# Altium PCB Relays.PcbDoc
Units mm, origin at the board's own origin, x right, y up, seen from the top; angles counter-clockwise.
Board outline 99 x 99 mm, 2 copper layers (Top Layer, Bottom Layer); 50 components, 27 nets, 119 pads, 2 vias.
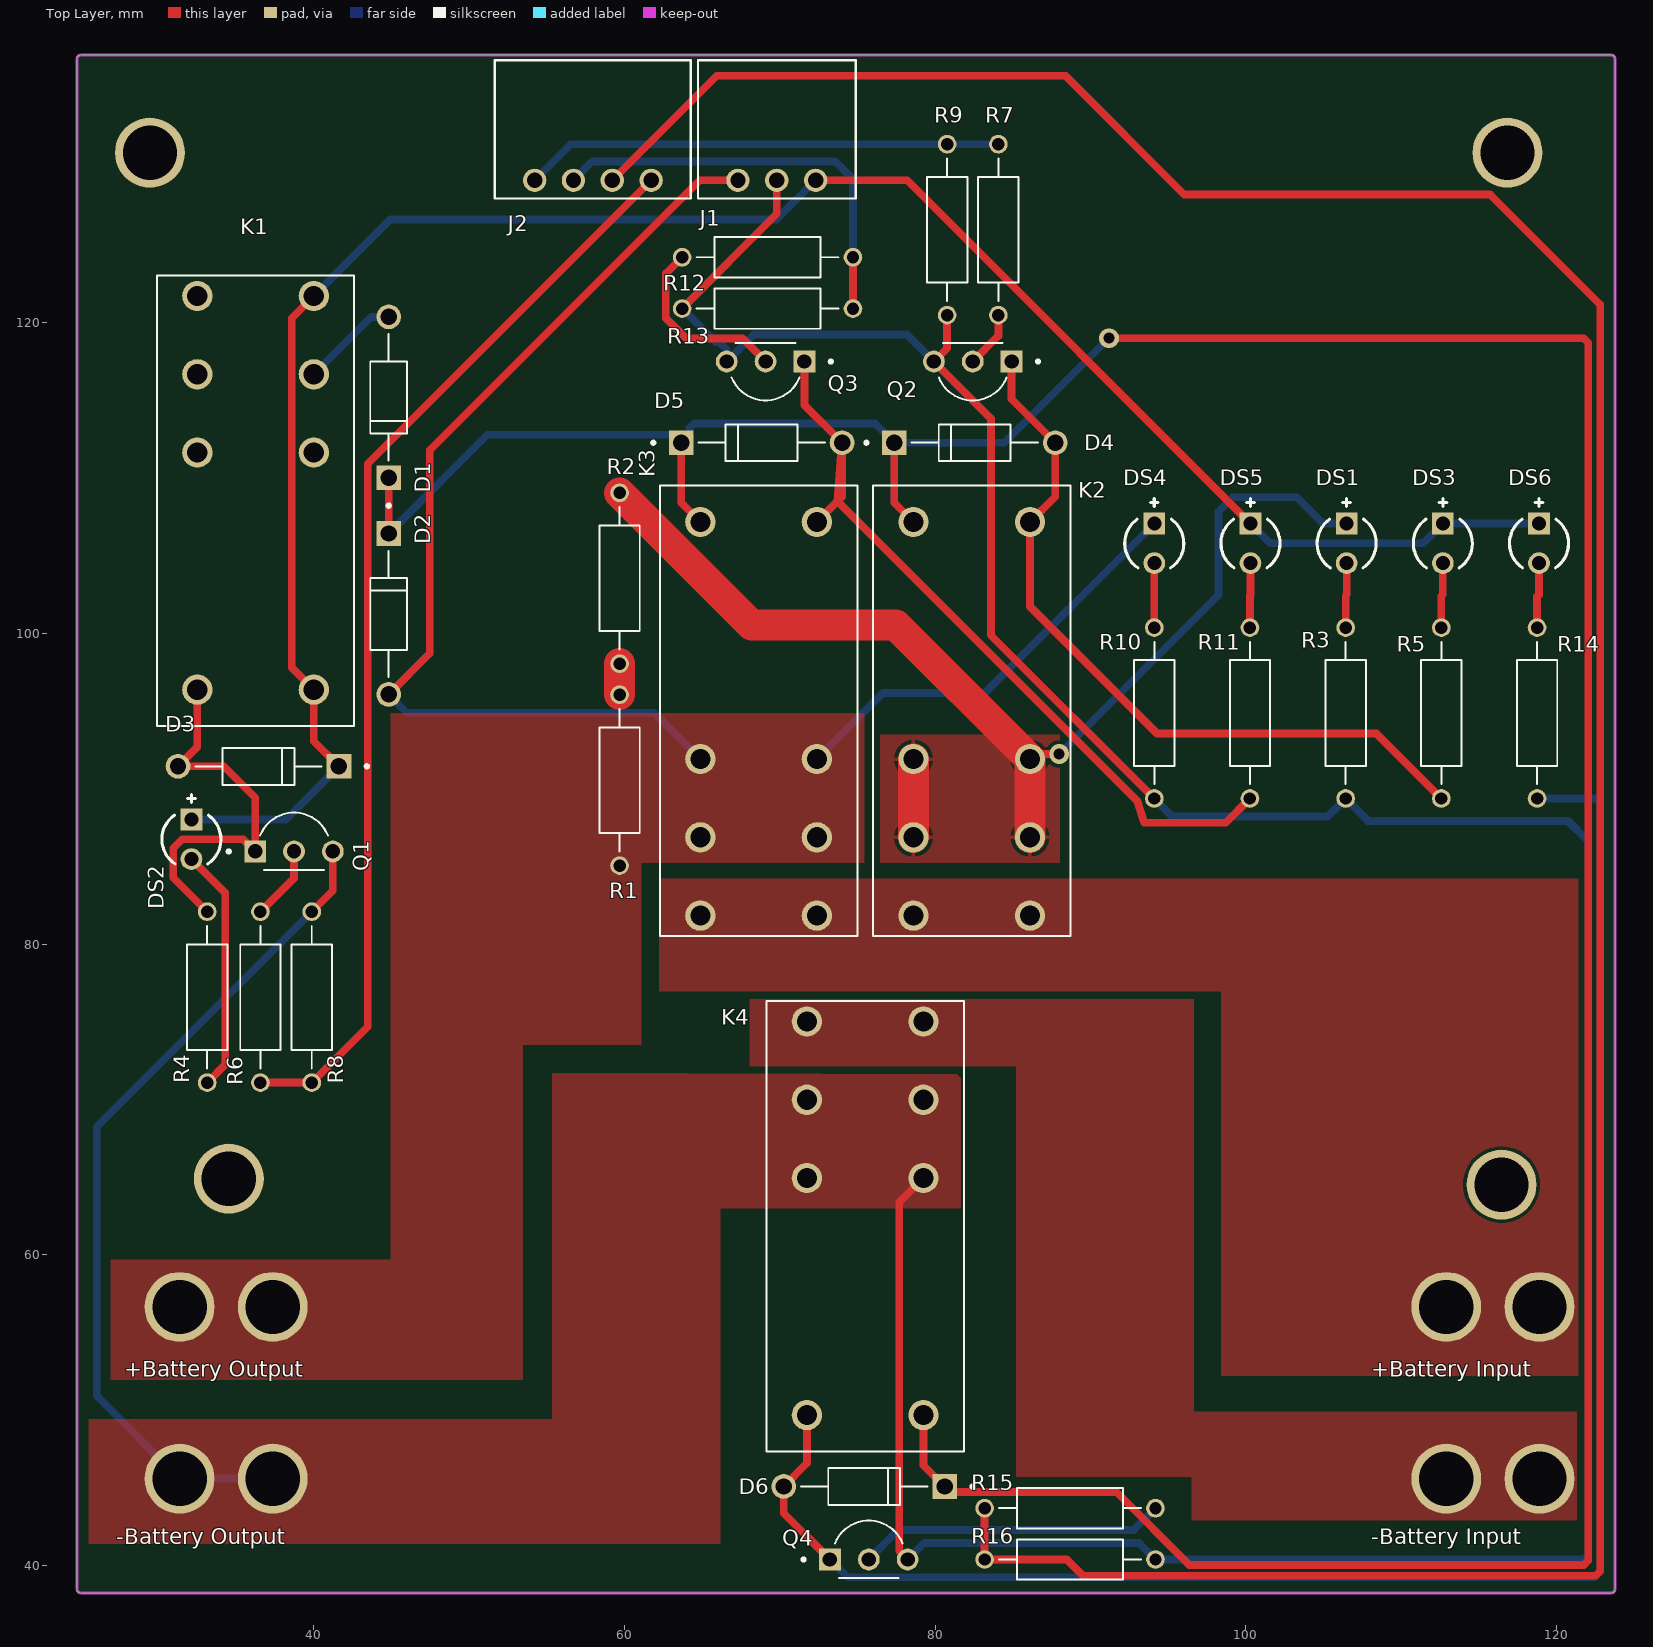
[diagram p0: Top Layer view]
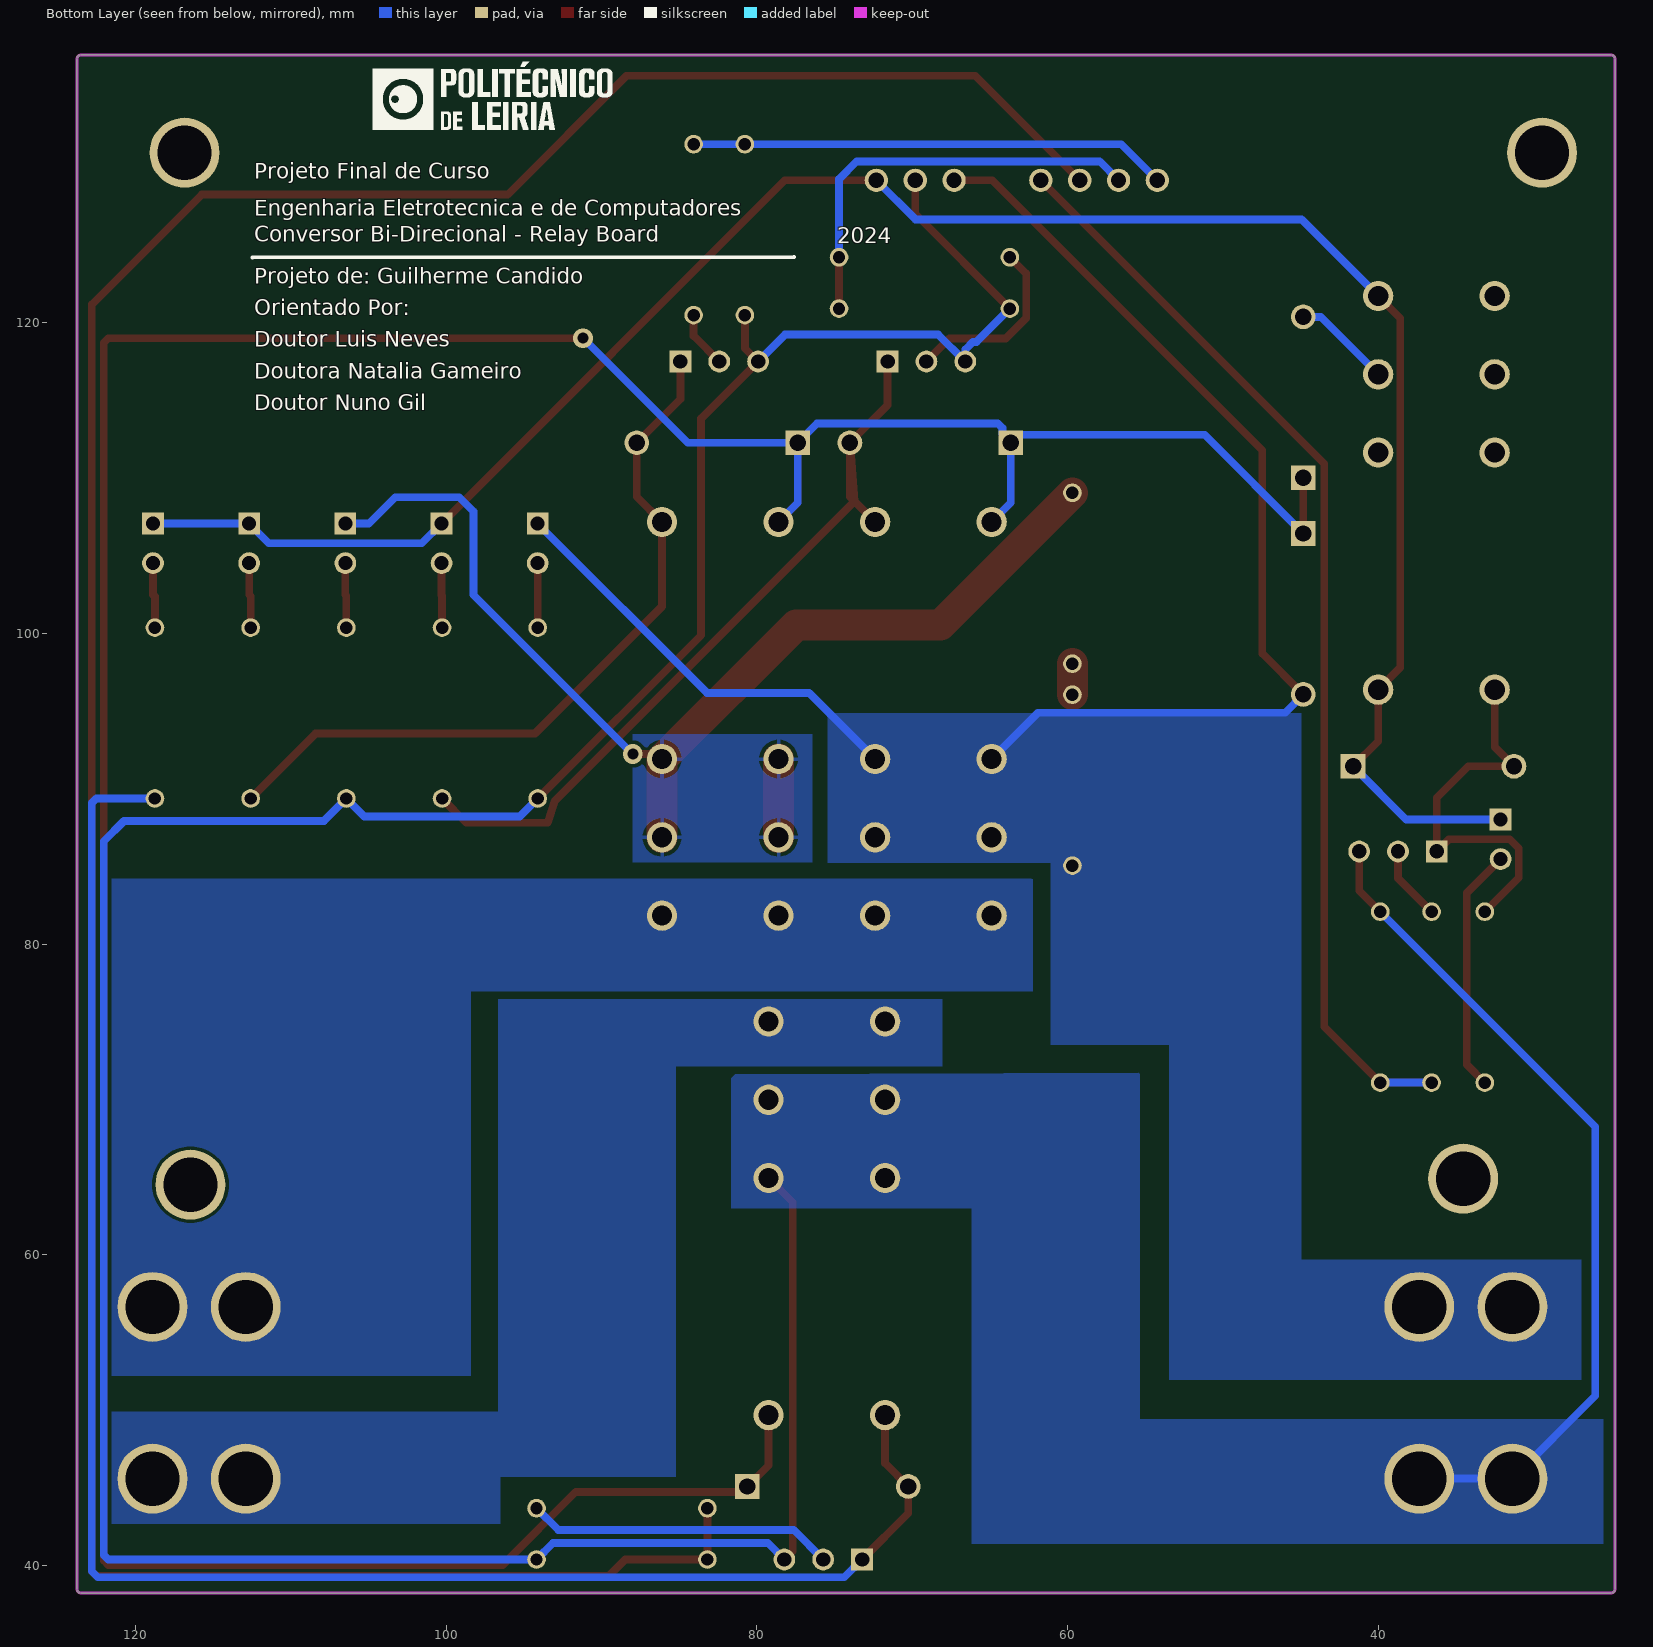
[diagram p1: Bottom Layer view, seen from below]

## Layer stack, top to bottom
Top Solder: solder mask 0.0102, Solder Resist, Dk 3.5
Top Layer: signal copper 0.0356
Dielectric 1: dielectric 0.32, FR-4, Dk 4.8
Bottom Layer: signal copper 0.0356
Bottom Solder: solder mask 0.0102, Solder Resist, Dk 3.5

## Board outline
24.765,38.481 24.765,136.973 cw(c25.019,136.973) 25.019,137.227 123.511,137.227 cw(c123.511,136.973) 123.765,136.973 123.765,38.481 cw(c123.511,38.481) 123.511,38.227 25.019,38.227 cw(c25.019,38.481)

## Design rules (kind name [scope] priority, off if disabled: settings)
Clearance [All] p1: gap=0.2 ignorepadtopadclearanceinfootprint=TRUE
HoleSize [All] p1: absolutevalues=TRUE maxlimit=6.3 minlimit=0.3 maxpercent=80.000 minpercent=20.000
HoleToHoleClearance [All] p1: gap=0.5 allowstackedmicrovias=TRUE
PolygonConnect DirectPour [InNetClass('DirectPour')] p1: connectstyle=Direct reliefconductorwidth=0.254 reliefentries=4 polygonreliefangle="90 Angle" airgapwidth=0.254
PolygonConnect [All] p2: connectstyle=Relief reliefconductorwidth=0.254 reliefentries=4 polygonreliefangle="90 Angle" airgapwidth=0.254
RoutingVias [All] p1: holewidth=0.711 width=1.27 viastyle="Through Hole" minholewidth=0.3 minwidth=0.5 maxholewidth=6.3 maxwidth=10
SilkToSilkClearance [All] p1: silktosilkclearance=0
SolderMaskExpansion [All] p1: expansion=0.102 istentingtop=FALSE
UnRoutedNet [All] p1: checkbadconnections=TRUE
Width [All] p1: maxlimit=5 minlimit=0.127 preferedwidth=0.5 minimp=50.000000 maximp=50.000000 favimp=50.000000
26 further rules are at their usual default settings.

## Classes and differential pairs
net class DirectPour: +12 +24 GND Net*4_1 Net*6_1
component class Relays: D1 D2 D3 D4 D5 D6 DS1 DS2 DS3 DS4 DS5 DS6 J1 J2 K1 K2 K3 K4 Q1 Q2 Q3 Q4 R1 R2 R3 R4 R5 R6 R7 R8 R9 R10 R11 R12 R13 R14 R15 R16

## Components (designator, comment, footprint, x,y, rotation, side; value= is the part's Value field where it differs from the comment)
* "M3 Mounting Hole" "M3 - Mounting Hole"#1 75.438,55.118 r0 top
*1 "M3 Mounting Hole" "M3 - Mounting Hole"#2 81.407,54.61 r0 top
*2 "M3 Mounting Hole" "M3 - Mounting Hole"#3 74.549,65.532 r0 top
*3 "M3 Mounting Hole" "M3 - Mounting Hole"#4 80.518,65.532 r0 top
*4 "M3 Mounting Hole" "M3 - Mounting Hole"#5 149.86,64.262 r0 top
*5 "M3 Mounting Hole" "M3 - Mounting Hole"#6 155.829,64.262 r0 top
*6 "M3 Mounting Hole" "M3 - Mounting Hole"#7 149.606,53.848 r0 top
*7 "M3 Mounting Hole" "M3 - Mounting Hole"#8 155.575,53.848 r0 top
*8 "M3 Mounting Hole" "M3 - Mounting Hole"#9 29.464,130.937 r0 top
*9 "M3 Mounting Hole" "M3 - Mounting Hole"#9 116.84,130.937 r0 top
*10 "M3 Mounting Hole" "M3 - Mounting Hole"#9 34.544,64.897 r0 top
*11 "M3 Mounting Hole" "M3 - Mounting Hole"#9 116.459,64.516 r0 top
D1 "1N4007" "Common Trhough Hole" 44.831,115.189 r90 top
D2 "1N4007" "Common Trhough Hole" 44.831,101.246 r270 top
D3 "Normal Diode" "Common Trhough Hole" 36.449,91.44 r180 top
D4 "Normal Diode" "Common Trhough Hole" 82.55,112.268 r0 top
D5 "Normal Diode" "Common Trhough Hole" 68.834,112.268 r0 top
D6 "Normal Diode" "Common Trhough Hole" 75.438,45.085 r180 top
DS1 "LTL-1CHE" LED_3mm 106.489,105.791 r270 top
DS2 "LTL-1CHE" LED_3mm 32.131,86.741 r270 top
DS3 "LTL-1CHE" LED_3mm 112.681,105.791 r270 top
DS4 "LTL-1CHE" LED_3mm 94.107,105.791 r270 top
DS5 "LTL-1CHE" LED_3mm 100.298,105.791 r270 top
DS6 "LTL-1CHE" LED_3mm 118.872,105.791 r270 top
J1 "S3B-XH-A(LF)(SN)" "3P JST XH2.54mm 90º" 67.31,129.159 r0 top
J2 "S4B-XH-A(LF)(SN)" "4P JST XH2.54mm 90º" 54.222,129.159 r0 top
K1 "relay 8pin" "Relay socket 8pin" 36.262,109.043 r90 top
K2 "relay 8pin" "Relay socket 8pin" 82.356,94.498 r270 top
K3 "relay 8pin" "Relay socket 8pin" 68.64,94.498 r270 top
K4 "relay 8pin" "Relay socket 8pin" 75.498,62.347 r90 top
Q1 "BC548" bc548 38.735,86.614 r0 top
Q2 "BC548" bc548 82.423,116.84 r180 top
Q3 "BC548" bc548 69.088,116.84 r180 top
Q4 "BC548" bc548 75.732,41.041 r0 top
R1 "Resistor" "Resistor_Through Hole" 59.69,90.551 r90 top
R2 "Resistor" "Resistor_Through Hole" 59.69,103.544 r90 top
R3 "Resistor_Through Hole" "Resistor_Through Hole" 106.426,94.869 r270 top
R4 "Resistor_Through Hole" "Resistor_Through Hole" 33.147,76.581 r90 top
R5 "Resistor_Through Hole" "Resistor_Through Hole" 112.585,94.869 r270 top
R6 "Resistor_Through Hole" "Resistor_Through Hole" 36.576,76.581 r270 top
R7 "Resistor_Through Hole" "Resistor_Through Hole" 84.074,125.984 r90 top
R8 "Resistor_Through Hole" "Resistor_Through Hole" 39.878,76.581 r270 top
R9 "Resistor_Through Hole" "Resistor_Through Hole" 80.772,125.984 r90 top
R10 "Resistor_Through Hole" "Resistor_Through Hole" 94.107,94.869 r270 top
R11 "Resistor_Through Hole" "Resistor_Through Hole" 100.266,94.869 r270 top
R12 "Resistor_Through Hole" "Resistor_Through Hole" 69.215,124.206 r0 top
R13 "Resistor_Through Hole" "Resistor_Through Hole" 69.215,120.904 r0 top
R14 "Resistor_Through Hole" "Resistor_Through Hole" 118.745,94.869 r270 top
R15 "Resistor_Through Hole" "Resistor_Through Hole" 88.685,43.688 r180 top
R16 "Resistor_Through Hole" "Resistor_Through Hole" 88.685,40.386 r180 top

## Footprints (in the part's own frame and the unit in brackets; to place one, negate y for a bottom-side part, rotate by r counter-clockwise, add the part's x,y. Pads: shape width x height; smd on the part's side, far side on the other; paste and mask are expansions set on the pad)
"3P JST XH2.54mm 90º" [mil]
  round 59 / inner round 60 / far side round 59 hole 39 paste-99999 mask+0: 1(0,0) 2(98.43,0) 3(196.86,0)
  silkscreen extent -101,-46 298,304, body extent -98,-10 295,285, height 236
"4P JST XH2.54mm 90º" [mil]
  round 59 / inner round 60 / far side round 59 hole 39 paste-99999 mask+0: 1(0,0) 2(98.43,0) 3(196.85,0) 4(295.28,0)
  silkscreen extent -101,-46 396,304, body extent -98,-10 394,285, height 236
bc548 [mm]
  rect 1.4x1.4 hole 0.93: 1(-2.5,-0.655)
  round 1.4 hole 0.93: 2(0,-0.655) 3(2.5,-0.655)
  silkscreen extent -4.3,-1.85 2.18,1.85, body extent -2.4,-1.53 2.4,2.4, height 7.74
"Common Trhough Hole" [mm]
  rect 1.59x1.59 / inner round 1.59 / far side rect 1.59x1.59 hole 1.06: 1(-5.18,0)
  round 1.59 hole 1.06: 2(5.18,0)
  silkscreen extent -7.07,-1.19 4.07,1.19, body extent -5.29,-1.36 5.29,1.36, height 2.72
LED_3mm [mm] "THD, 2-Leads, Dia 3.8mm, Pitch 2.54mm"
  rect 1.4x1.4 hole 0.9: 1(-1.27,0)
  round 1.4 hole 0.9: 2(1.27,0)
  silkscreen extent -2.87,-1.9 1.58,1.9, body extent -1.9,-1.9 1.9,1.9, height 6.5
"M3 - Mounting Hole"#1 [mm]
  round 4.5 / inner round 1.524 / far side round 4.5 hole 3.5: 1(-44.069,-9.525)
"M3 - Mounting Hole"#2 [mm]
  round 4.5 / inner round 1.524 / far side round 4.5 hole 3.5: 1(-44.038,-9.017)
"M3 - Mounting Hole"#3 [mm]
  round 4.5 / inner round 1.524 / far side round 4.5 hole 3.5: 1(-43.18,-8.89)
"M3 - Mounting Hole"#4 [mm]
  round 4.5 / inner round 1.524 / far side round 4.5 hole 3.5: 1(-43.149,-8.89)
"M3 - Mounting Hole"#5 [mm]
  round 4.5 / inner round 1.524 / far side round 4.5 hole 3.5: 1(-36.957,-7.62)
"M3 - Mounting Hole"#6 [mm]
  round 4.5 / inner round 1.524 / far side round 4.5 hole 3.5: 1(-36.926,-7.62)
"M3 - Mounting Hole"#7 [mm]
  round 4.5 / inner round 1.524 / far side round 4.5 hole 3.5: 1(-36.703,-8.255)
"M3 - Mounting Hole"#8 [mm]
  round 4.5 / inner round 1.524 / far side round 4.5 hole 3.5: 1(-36.672,-8.255)
"M3 - Mounting Hole"#9 [mm]
  round 4.5 / inner round 1.524 / far side round 4.5 hole 3.5: 1(0,0)
"Relay socket 8pin" [mm]
  round 1.95 hole 1.3: 11(7.63,-3.75) 12(2.59,-3.75) 14(12.67,-3.75) 21(7.63,3.75) 22(2.59,3.75) 24(12.67,3.75) A1(-12.67,-3.75) A2(-12.67,3.75)
  silkscreen extent -15.02,-6.35 13.98,6.35, body extent -15.48,-6.2 15.48,6.45, height 8.9
"Resistor_Through Hole" [mm]
  round 1.2 hole 0.8: 1(-5.5,0) 2(5.5,0)
  silkscreen extent -4.58,-1.3 4.58,1.3, body extent -5.84,-1.29 5.71,1.29, height 2.6

## Part data
D1 D2: library part "Normal Diode", Package="DO-41 NTE Electronics", Availability="In Stock", Check_prices=https://www.snapeda.com/parts/1N4007/NTE+Electronics/view-part/?ref=eda, MF="NTE Electronics, Inc.", MP=1N4007, Price=None, Purchase-URL=https://pricing.snapeda.com/search/part/1N4007/?ref=eda, SnapEDA_Link=https://www.snapeda.com/parts/1N4007/NTE+Electronics/view-part/?ref=snap
D3 D4 D5 D6: Package="DO-41 NTE Electronics", Availability="In Stock", Check_prices=https://www.snapeda.com/parts/1N4007/NTE+Electronics/view-part/?ref=eda, MF="NTE Electronics, Inc.", MP=1N4007, Price=None, Purchase-URL=https://pricing.snapeda.com/search/part/1N4007/?ref=eda, SnapEDA_Link=https://www.snapeda.com/parts/1N4007/NTE+Electronics/view-part/?ref=snap
DS1 DS2 DS3 DS4 DS5 DS6: library part "RED_LED 3mm", "Radial LED, 12.6 mcd, 20 mA, 2 V, -55 to 100 degC, 2-Pin THD, RoHS, Bulk", Case\Package=Radial, Current Rating="3.6 A", Max Operating Temperature="130 degC", Min Operating Temperature="-40 degC", Package Quantity=55, Resistance="0.045 Ohm", Tolerance=20%, ComponentLink1Description="Manufacturer URL", ComponentLink1URL=http://www.us.liteon.com/, ComponentLink2Description=Datasheet, ComponentLink2URL=https://datasheet.ciiva.com/15117/getdatasheetpartid-187746-15117985.pdf, DatasheetVersion=Dec-03, Height="1.1 inch", Lead Pitch="11.44 mm", Length="0.97 inch", Mount="Through Hole", PackageDescription="2-Pin Through Hole Device, Dia 3.8 mm, Pitch 2.54 mm", PackageReference=LTL-1CHE, Packaging=Tray, Radiation Hardening=No, RoHSCompliant=true, Shielding=Unshielded, Width="0.62 inch"
J1: library part "3P JST XH2.54mm 90º", "No Description Available", Mfr_Name=JST, Copyright="Copyright (C) 2024 Ultra Librarian. All rights reserved.", Manufacturer_Part_Number=S3B-XH-A(LF)(SN), RefDes=RefDes, Type=DEV
J2: library part "4P JST XH2.54mm 90º", "No Description Available", Mfr_Name=JST, Copyright="Copyright (C) 2024 Ultra Librarian. All rights reserved.", Manufacturer_Part_Number=S4B-XH-A(LF)(SN), RefDes=RefDes, Type=DEV
K1 K2 K3 K4: "General Purpose Relay DPDT _2 Form C_ 24VDC Coil Through Hole", Package=None, Availability=Unavailable, MF="TE Connectivity", MP=1-1393243-0, Price=None, SnapEDA_Link=https://www.snapeda.com/parts/1-1393243-0/TE%20Connectivity%20Potter%20&%20Brumfield%20Relays/view-part/244556/?ref=snap
Q1 Q2 Q3 Q4: "Bipolar (BJT) Transistor NPN 30V 100mA 300MHz 500mW Through Hole TO-92-3", Package="TO-92 ON Semiconductor", Availability=Warning, DigiKey-Purchase-URL=https://snapeda.com/shop?store=DigiKey&id=2007035, MF="ON Semiconductor", MP=BC548, Price=None, SnapEDA_Link=https://www.snapeda.com/parts/BC548/ON%20Semiconductor/view-part/2007035/?ref=snap
R1 R2: Package=0805, Power_Rating=".25 W", Resistance=.33, Tolerance=1%, Availability="In Stock", Check_prices=https://www.snapeda.com/parts/2-2176053-0/TE+Connectivity/view-part/?ref=eda, EU_RoHS_Compliance="Compliant with Exemptions", MF="TE Connectivity", MP=2-2176053-0, Price=None, SnapEDA_Link=https://www.snapeda.com/parts/2-2176053-0/TE+Connectivity/view-part/?ref=snap
R3 R4 R5 R6 R7 R8 R9 R10 R11 R12 R13 R14 R15 R16: "1.02 Ohms Â±1% 0.25W, 1/4W Through Hole Resistor Axial Metal Film", Package="Axial Yageo", Availability=Warning, Check_prices=https://www.snapeda.com/parts/MFR-25FTE52-1R/Yageo/view-part/4629919/?ref=eda, MF=Yageo, MP=MFR-25FTE52-1R, Price=None, Purchase-URL=https://pricing.snapeda.com/search/part/MFR-25FTE52-1R/?ref=eda, SnapEDA_Link=https://www.snapeda.com/parts/MFR-25FTE52-1R/Yageo/view-part/4629919/?ref=snap

## Via types
v1: diameter 1.27, hole 0.711, Top Layer to Bottom Layer, 2 vias

## Nets (pads, with @x,y where several pads share a name; then routed paths per layer and width w, separated by ;. In a path a pad name is that pad's centre, name@x,y a point inside that pad or via, vN(x,y) a via of type N, cw(c..) or ccw(c..) an arc to the next point about the centre after c; other vN are vias at no path point)
+12: *2.1 *3.1 D2.2 DS4.1 J1.1 K3.11 K3.12 K3.21 K3.22 R1.1 | length 93.6
  Top Layer w0.5: D2.2 47.473,98.708 47.473,111.785 64.846,129.159 J1.1
  Bottom Layer w0.5: D2.2 46.003,94.894 61.904,94.894 K3.12 ; K3.22 76.646,96.164 83.21,96.164 DS4.1
+24: D3.1 DS2.1 DS3.1 DS5.1 DS6.1 J1.3 K1.14 K1.A1 | length 135.2
  Top Layer w0.5: K1.14 38.583,120.284 38.583,97.802 K1.A1 40.012,93.057 D3.1 ; J1.3 78.2,129.159 DS5.1
  Bottom Layer w0.5: DS2.1 38.2,88.011 D3.1 ; K1.14 44.943,126.644 69.796,126.644 J1.3 ; DS5.1 101.568,105.791 111.411,105.791 DS3.1 DS6.1
"Coil Power": D1.1 D2.1 D4.1 D5.1 D6.1 K2.A1 K3.A1 K4.A1 | length 237.4
  Top Layer w0.5: D2.1 D1.1 ; D5.1 63.654,108.404 K3.A1 ; D4.1 77.37,108.404 K2.A1 ; K4.A1 79.248,46.455 D6.1 80.965,44.738 91.65,44.738 96.352,40.036 121.754,40.036 122.047,40.329 122.047,118.706 121.754,118.999 v1(91.186,118.999)
  Bottom Layer w0.5: D2.1 51.181,112.776 63.146,112.776 D5.1 ; K3.A1 63.654,108.404 D5.1 ; K2.A1 77.37,108.404 D4.1 ; v1(91.186,118.999) 84.455,112.268 D4.1 ; D5.1 64.199,112.813 64.199,113.22 64.492,113.513 76.125,113.513 D4.1
GND: *1.1 *.1 J1.2 K4.11 K4.12 K4.21 K4.22 Q1.3 Q2.3 Q3.3 Q4.3 R3.2 R8.1 R9.1 R10.2 R13.1 R16.1 | length 268.7
  Top Layer w0.5: R8.1 41.235,83.438 Q1.3 ; R13.1 69.81,126.999 J1.2 ; Q4.3 77.699,40.919 77.699,63.388 K4.12 ; R9.1 80.772,118.344 Q2.3 83.591,113.827 83.591,99.885 R10.2
  Bottom Layer w0.5: *1.1 *.1 26.035,50.927 26.035,68.238 R8.1 ; R13.1 65.862,118.757 66.094,118.757 66.588,118.262 Q3.3 68.321,119.228 78.19,119.228 Q2.3 ; Q4.3 79.299,41.453 93.118,41.453 R16.1 121.754,40.386 122.047,40.679 122.047,86.614 120.736,87.925 107.87,87.925 R3.2 105.271,88.214 95.262,88.214 R10.2
Net*4_1: *4.1 *5.1 K2.14 K2.24 K3.14 K3.24
Net*6_1: *6.1 *7.1 K4.14 K4.24
NetD1_2: D1.2 K1.11 | length 6.3
  Bottom Layer w0.5: K1.11 43.708,120.369 D1.2
NetD3_2: D3.2 K1.A2 Q1.1 R4.2 | length 25.5
  Top Layer w0.5: K1.A2 32.512,92.683 D3.2 34.203,91.44 36.235,89.408 Q1.1 35.453,86.741 31.547,86.741 30.963,86.157 30.963,84.265 R4.2
NetD4_2: D4.2 K2.A2 Q2.1 R5.2 | length 49.2
  Top Layer w0.5: Q2.1 84.923,115.075 D4.2 87.73,108.792 K2.A2 86.106,101.727 94.285,93.548 108.406,93.548 R5.2
NetD5_2: D5.2 K3.A2 Q3.1 R11.2 | length 52
  Top Layer w0.5: Q3.1 71.588,114.694 D5.2 ; K3.A2 73.721,108.499 ; R11.2 98.705,87.808 93.472,87.808 93.015,89.205 73.721,108.499 ; 73.721,108.499 74.014,108.792 D5.2 ; 73.721,108.499 D5.2
NetD6_2: D6.2 K4.A2 Q4.1 R14.2 | length 115
  Top Layer w0.5: K4.A2 71.748,46.575 D6.2 70.258,43.36 Q4.1
  Bottom Layer w0.5: Q4.1 74.382,39.236 122.421,39.236 122.809,39.624 122.809,89.076 122.516,89.369 R14.2
NetDS1_1: DS1.1 K2.11 K2.12 K2.21 K2.22 R2.2 | length 74.8
  Top Layer w0.5: K2.22 86.425,92.227 v1(87.986,92.227)
  Top Layer w2: R2.2 68.186,100.548 77.466,100.548 K2.22 K2.21 ; K2.11 K2.12
  Bottom Layer w0.5: v1(87.986,92.227) 98.247,102.489 98.247,107.848 99.162,108.763 103.276,108.763 104.978,107.061 DS1.1
NetDS1_2: DS1.2 R3.1 | length 4.2
  Top Layer w0.5: R3.1 106.426,102.413 106.489,102.476 DS1.2
NetDS2_2: DS2.2 R4.1 | length 15.8
  Top Layer w0.5: DS2.2 34.315,83.287 34.315,72.249 R4.1
NetDS3_2: DS3.2 R5.1 | length 4.2
  Top Layer w0.5: R5.1 112.585,102.387 112.681,102.483 DS3.2
NetDS4_2: DS4.2 R10.1 | length 4.2
  Top Layer w0.5: R10.1 DS4.2
NetDS5_2: DS5.2 R11.1 | length 4.2
  Top Layer w0.5: R11.1 100.266,102.413 100.298,102.445 DS5.2
NetDS6_2: DS6.2 R14.1 | length 4.2
  Top Layer w0.5: R14.1 118.745,102.362 118.872,102.489 DS6.2
NetJ2_1: J2.1 R7.2 R9.2 | length 30.8
  Bottom Layer w0.5: J2.1 56.547,131.484 R9.2 R7.2
NetJ2_2: J2.2 R12.2 R13.2 | length 27.3
  Top Layer w0.5: R13.2 R12.2
  Bottom Layer w0.5: J2.2 57.941,130.378 73.572,130.378 74.715,129.235 R12.2
NetJ2_3: J2.3 R15.2 R16.2 | length 197.5
  Top Layer w0.5: J2.3 65.953,135.89 88.392,135.89 96.045,128.237 115.73,128.237 122.809,121.158 122.809,39.629 122.516,39.336 89.522,39.336 88.472,40.386 R16.2 R15.2
NetJ2_4: J2.4 R6.2 R8.2 | length 73.7
  Top Layer w0.5: R6.2 R8.2 43.485,74.688 43.485,110.922 J2.4
  Bottom Layer w0.5: R6.2 R8.2
NetQ1_2: Q1.2 R6.1 | length 4.8
  Top Layer w0.5: R6.1 38.735,84.24 Q1.2
NetQ2_2: Q2.2 R7.1 | length 3.7
  Top Layer w0.5: Q2.2 84.074,119.146 R7.1
NetQ3_2: Q3.2 R12.1 | length 11.9
  Top Layer w0.5: R12.1 62.662,123.153 62.662,120.294 63.983,118.974 67.609,118.974 Q3.2
NetQ4_2: Q4.2 R15.1 | length 19.8
  Bottom Layer w0.5: Q4.2 77.637,42.291 92.788,42.291 R15.1
NetR1_2: R1.2 R2.1 | length 2
  Top Layer w2: R1.2 R2.1
pads on no net: *8.1 *9.1 *10.1 *11.1 K1.12 K1.21 K1.22 K1.24

## Polygon pours and split planes (outlines as drawn)
GND on Top Layer "GND_L01_P002" (solid, remove dead copper, pour order 2): 81.407,71.628 81.661,71.374 81.661,62.992 66.167,62.992 66.167,41.402 25.527,41.402 25.527,49.403 55.372,49.403 55.372,71.727
Net*6_1 on Top Layer "NET*6_1_L01_P006" (solid, remove dead copper, pour order 6): 68.072,76.454 96.647,76.454 96.647,49.911 121.285,49.911 121.285,42.926 96.52,42.926 96.52,45.72 85.217,45.72 85.217,72.136 68.072,72.136
NetDS1_1 on Top Layer "NETDS1_1_L01_P004" (solid, remove dead copper, pour order 4): 76.454,93.472 88.011,93.472 88.011,85.217 76.454,85.217
+12 on Top Layer "+12_L01_P003" (solid, remove dead copper, pour order 3): 75.438,85.217 61.087,85.217 61.087,73.533 53.467,73.533 53.467,51.943 26.924,51.943 26.924,59.69 44.958,59.69 44.958,94.869 52.578,94.869 75.438,94.869
Net*4_1 on Top Layer "NET*4_1_L01_P000" (solid, remove dead copper, pour order 0): 62.23,84.328 62.357,84.201 121.412,84.201 121.412,52.197 98.425,52.197 98.425,76.962 62.23,76.962
NetDS1_1 on Bottom Layer "NETDS1_1_L02_P009" (solid, remove dead copper, pour order 9): 76.421,93.505 87.978,93.505 87.978,85.25 76.421,85.25
Net*6_1 on Bottom Layer "NET*6_1_L02_P001" (solid, remove dead copper, pour order 1): 68.072,76.454 96.647,76.454 96.647,49.911 121.539,49.911 121.539,42.672 96.52,42.672 96.52,45.72 85.217,45.72 85.217,72.136 68.072,72.136
GND on Bottom Layer "GND_L02_P007" (solid, remove dead copper, pour order 7): 81.407,71.628 81.661,71.374 81.661,62.992 66.167,62.992 66.167,41.402 25.527,41.402 25.527,49.403 55.372,49.403 55.372,71.727
+12 on Bottom Layer "+12_L02_P008" (solid, remove dead copper, pour order 8): 75.438,85.217 61.087,85.217 61.087,73.533 53.467,73.533 53.467,51.943 26.924,51.943 26.924,59.69 44.958,59.69 44.958,94.869 52.578,94.869 75.438,94.869
Net*4_1 on Bottom Layer "NET*4_1_L02_P005" (solid, remove dead copper, pour order 5): 62.23,84.328 62.357,84.201 121.539,84.201 121.539,52.197 98.425,52.197 98.425,76.962 62.23,76.962

## Keep-outs
Keep-Out Layer:
  the board outline again, w0.18

## Silkscreen, mask and mechanical layers (free items; w line width, h text height)
Top Overlay:
  text "+Battery Output" at 27.813,52.149 h1
  text "+Battery Input" at 108.077,52.149 h1
  text "-Battery Output" at 27.305,41.354 h1
  text "-Battery Input" at 108.077,41.354 h1
Bottom Overlay:
  drawing of 23 lines, arcs and shapes, not listed
  text "Projeto Final de Curso" at 112.351,129.257 h1
  text "Engenharia Eletrotecnica e de Computadores" at 112.351,126.892 h1
  text "Conversor Bi-Direcional - Relay Board" at 112.351,125.194 h1
  text "2024" at 74.815,125.114 h1
  text "Projeto de: Guilherme Candido" at 112.351,122.496 h1
  text "Orientado Por:" at 112.351,120.464 h1
  text "Doutor Luis Neves" at 112.351,118.433 h1
  text "Doutora Natalia Gameiro" at 112.351,116.401 h1
  text "Doutor Nuno Gil" at 112.351,114.37 h1